# Altium PCB PCB1.PcbDoc
Units mil, origin at the board's own origin, x right, y up, seen from the top; angles counter-clockwise.
Board outline 1455 x 980 mil, 2 copper layers (Top Layer, Bottom Layer); 6 components, 4 nets, 26 pads, 2 vias.
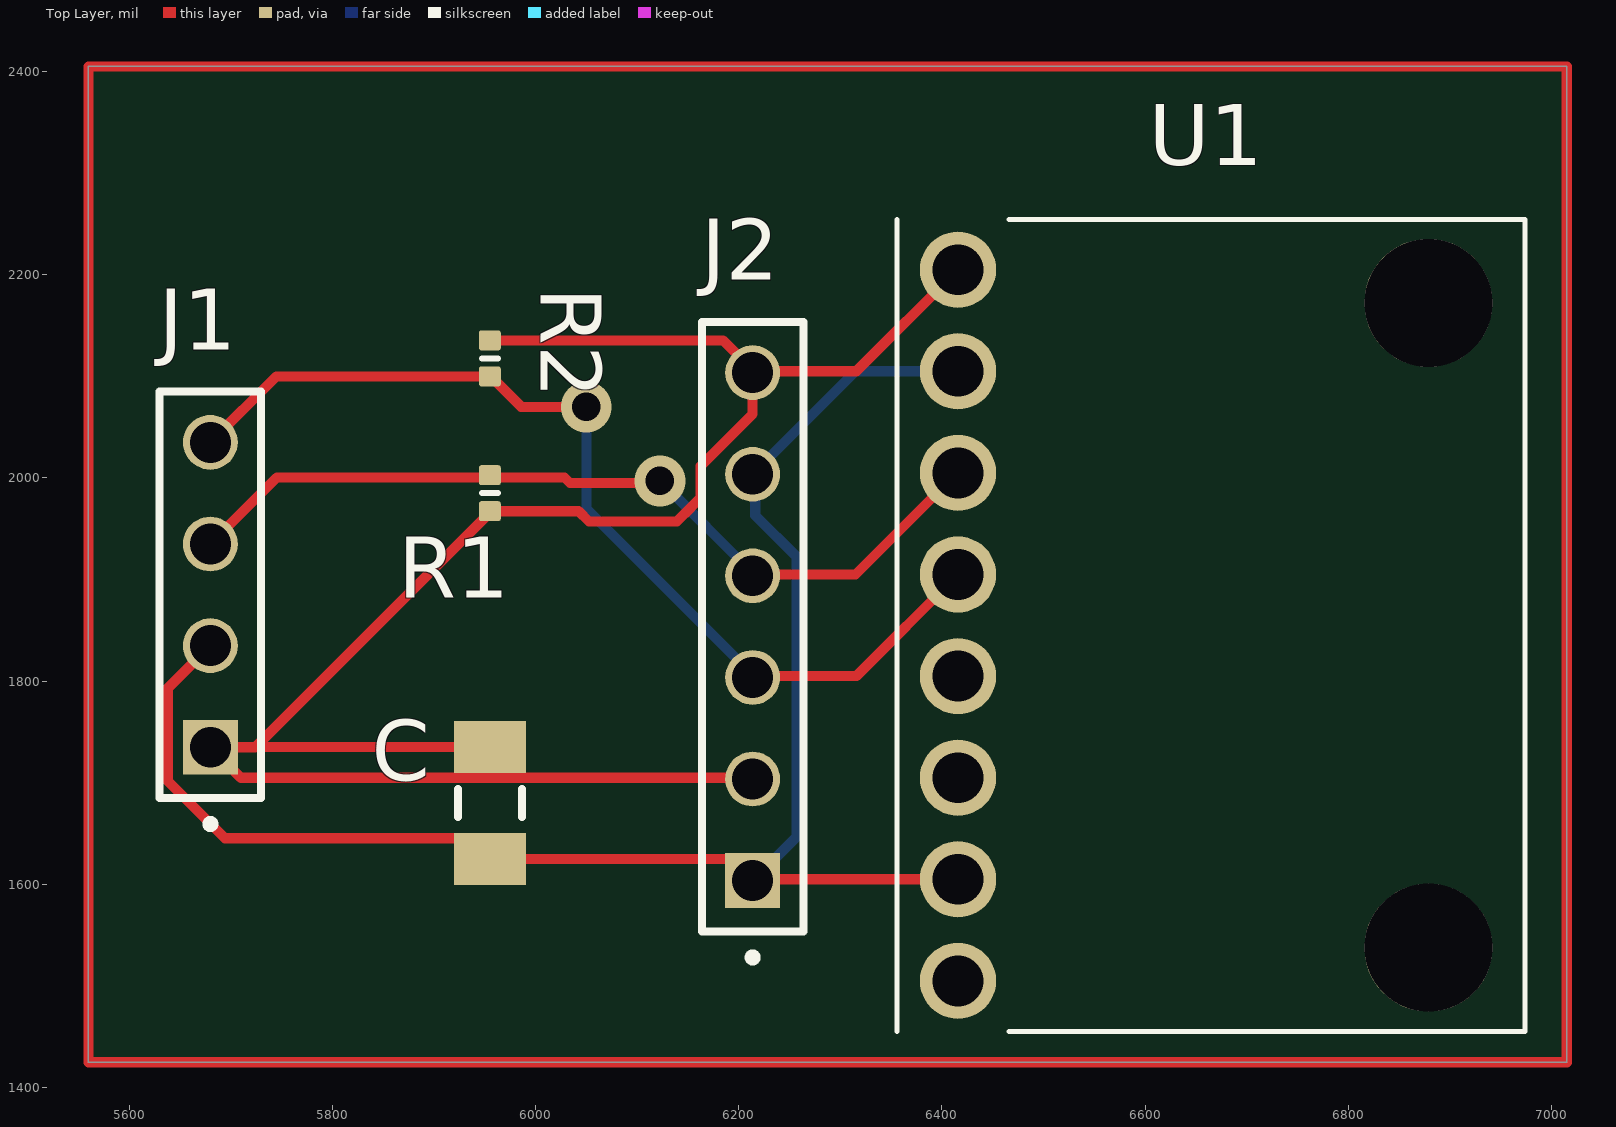
[diagram p0: Top Layer view]
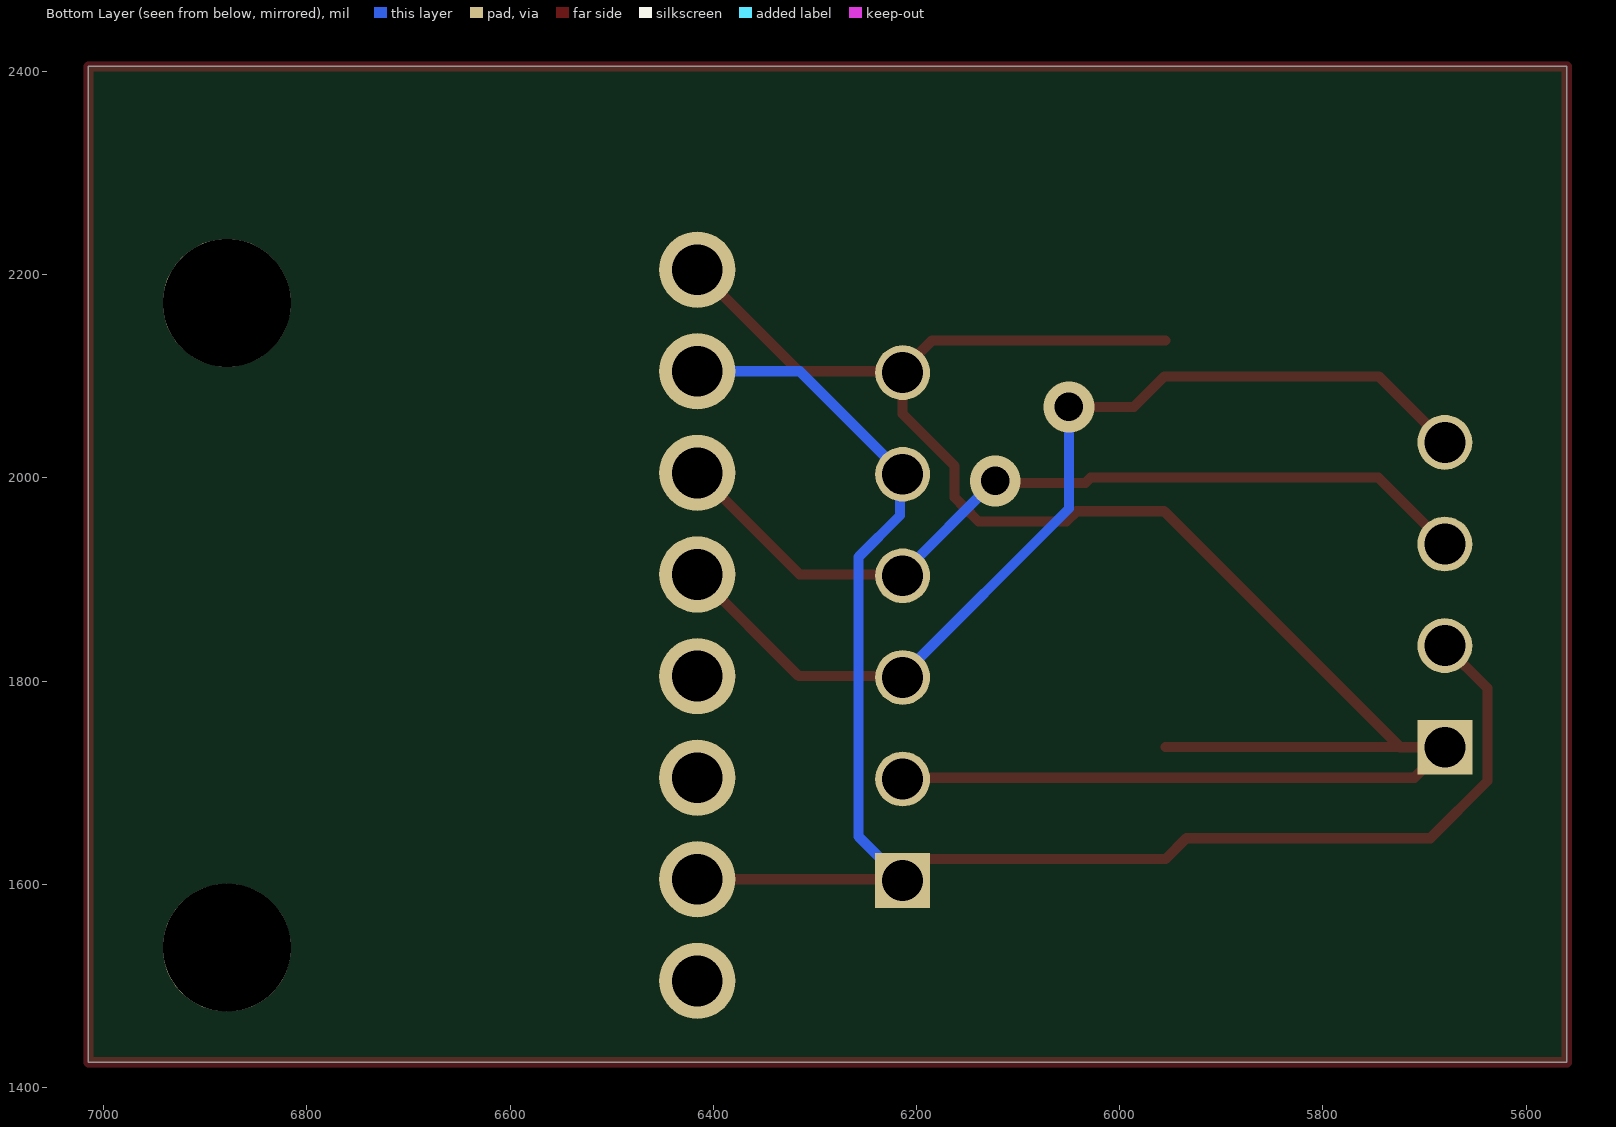
[diagram p1: Bottom Layer view, seen from below]
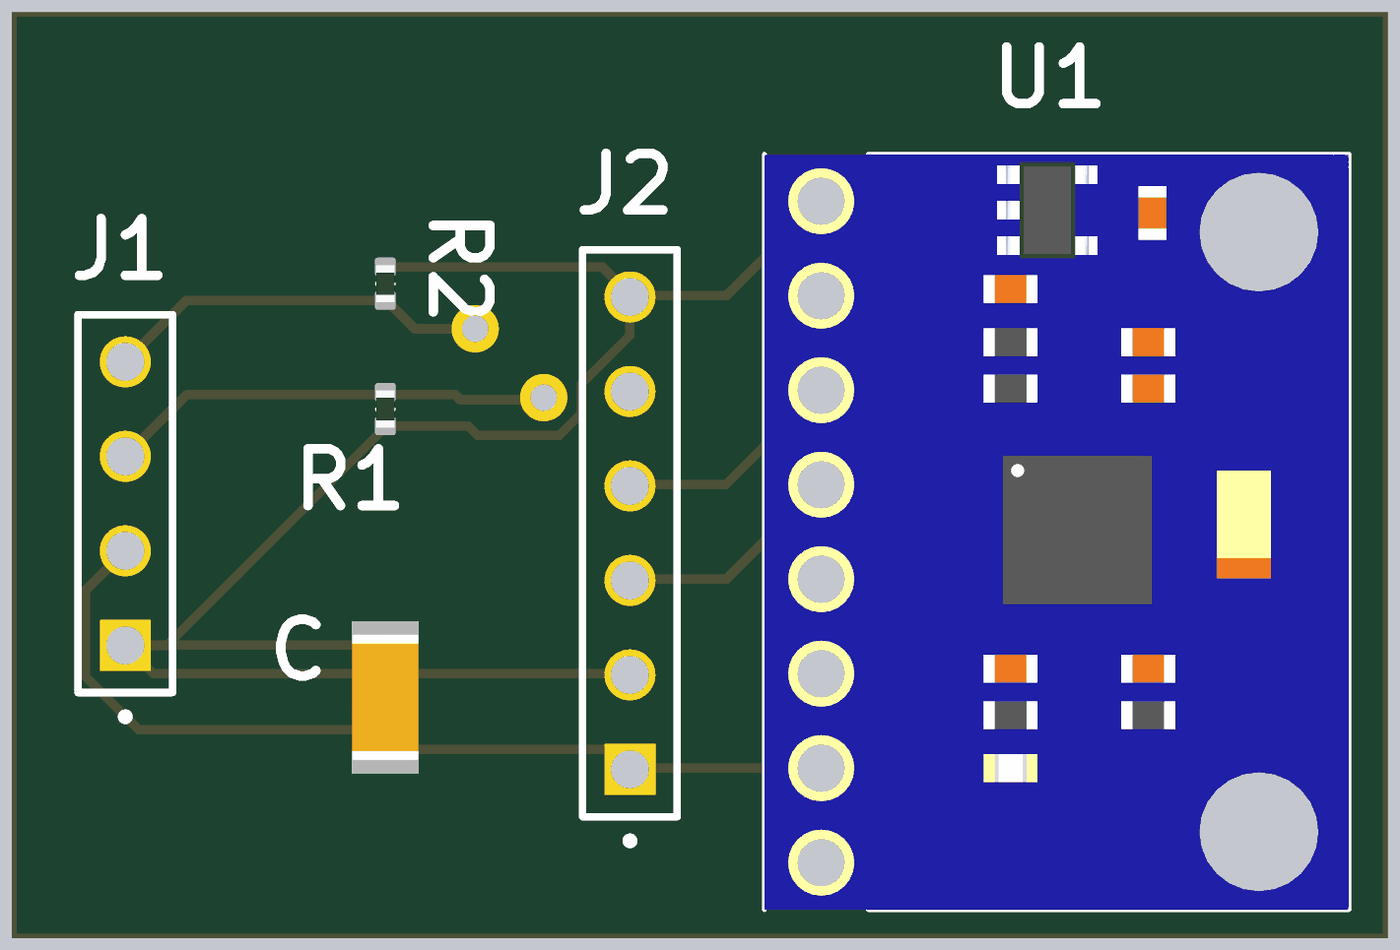
[diagram p2: 3D render of the assembled board from above, using the file's embedded part models]

## Layer stack, top to bottom
Top Solder: solder mask 0.4, Solder Resist, Dk 3.5
Top Layer: signal copper 1.4
Dielectric 1: core 12.6, FR-4, Dk 4.8
Bottom Layer: signal copper 1.4
Bottom Solder: solder mask 0.4, Solder Resist, Dk 3.5

## Board outline
5560,1425 5560,2405 7015,2405 7015,1425

## Design rules (kind name [scope] priority, off if disabled: settings)
Clearance [All] p1: gap=10 ignorepadtopadclearanceinfootprint=FALSE
PolygonConnect [All] p1: connectstyle=Relief reliefconductorwidth=10 reliefentries=4 polygonreliefangle="90 Angle" airgapwidth=10
RoutingVias [All] p1: holewidth=28 width=50 viastyle="Through Hole" minholewidth=28 minwidth=50 maxholewidth=28 maxwidth=50
SolderMaskExpansion [All] p1: expansion=0 istentingtop=FALSE
SupplyNets "Schematic Supply Nets" [InNet('GND')] p1: voltage=0.000
Width [All] p1: maxlimit=10 minlimit=10 preferedwidth=10
30 further rules are at their usual default settings.

## Components (designator, comment, footprint, x,y, rotation, side; value= is the part's Value field where it differs from the comment)
C "Capacitor 10 uF +/- 10% 16 V 1206" CAPC3216X180X50NL20T25 5955,1680 r270 top value=10µF
J1 "TSW-104-26-G-S" SAMTEC_TSW-104-26-G-S 5680,1735 r90 top
J2 "TSW-106-26-G-S" SAMTEC_TSW-106-26-G-S 6213.68,1603.68 r90 top
R1 "1KR2J" RESC0402(1005)_L 5955,1985 r90 top value=1k
R2 "1KR2J" RESC0402(1005)_L 5955,2117.72 r270 top value=1k
U1 "GY-521" MODULE_GY-521 6665,1855 r0 top

## Footprints (in the part's own frame and the unit in brackets; to place one, negate y for a bottom-side part, rotate by r counter-clockwise, add the part's x,y. Pads: shape width x height; smd on the part's side, far side on the other; paste and mask are expansions set on the pad)
CAPC3216X180X50NL20T25 [mm] "Chip Capacitor, 2-Leads, Body 3.40x1.80mm, IPC Medium Density"
  rect 1.3x1.8 smd: 1(-1.4,0) 2(1.4,0)
  silkscreen extent -0.35,-0.8 0.35,0.8, body extent -1.7,-0.9 1.7,0.9, height 1.8
MODULE_GY-521 [mm]
  round 1.905 hole 1.27 mask+0.102: AD0(-6.33,-6.35) GND(-6.33,6.35) INT(-6.33,-8.89) SCL(-6.33,3.81) SDA(-6.33,1.27) VCC(-6.33,8.89) XCL(-6.33,-3.81) XDA(-6.33,-1.27)
  round 3.2 hole 3.2 unplated mask+0: ""(5.43,-8.06) ""(5.43,8.06)
  silkscreen extent -7.85,-10.15 7.85,10.15, body extent -7.85,-10.15 7.85,10.15, height 3
RESC0402(1005)_L [mm] "Chip Resistor, Body 1.0x0.5mm, IPC High Density"
  rrect25% 0.5x0.55 smd: 1(-0.45,0) 2(0.45,0)
  silkscreen extent 0,-0.2 0,0.2, body extent -0.5,-0.25 0.5,0.25, height 0.3
SAMTEC_TSW-104-26-G-S [mm]
  rect 1.37x1.37 hole 1.02: 01(0,0)
  round 1.37 hole 1.02: 02(2.54,0) 03(5.08,0) 04(7.62,0)
  silkscreen extent -2.02,-1.27 8.89,1.27
SAMTEC_TSW-106-26-G-S [mm]
  rect 1.37x1.37 hole 1.02: 01(0,0)
  round 1.37 hole 1.02: 02(2.54,0) 03(5.08,0) 04(7.62,0) 05(10.16,0) 06(12.7,0)
  silkscreen extent -2.02,-1.27 13.97,1.27

## Part data
C: library part CMP-001-00016-6, "Chip Capacitor, 10 uF, +/- 10%, 16 V, 1206 (3216 Metric)", Capacitor Type=Ceramic, Case/Package=1206, Max Operating Temperature=125°C, Min Operating Temperature=-55°C, Tolerance=10%, Voltage Rating=16V, Mounting Technology=SM, Pins=2, RoHS Compliant=True
J1: library part CMP-009-000000-1, Package=None, Availability=Unavailable, Component Type=Standard, Design Item ID=TSW-104-26-G-S, MP=TSW-104-26-G-S, Pin Count=4, Price=None, Source=TSW-104-26-G-S.SchLib
J2: library part CMP-007-000000-1, Package=None, Availability=Unavailable, Component Type=Standard, Design Item ID=TSW-106-26-G-S, MP=TSW-106-26-G-S, Pin Count=6, Price=None, Source=TSW-106-26-G-S.SchLib
R1 R2: library part CMP-009-00075-2, "1K 0.063W 5% 0402 (1005 Metric)  SMD", Case/Package=0402, Power=63mW, Tolerance=5%, Mounting Technology=SMT, Pins=2
U1: library part CMP-005-000000-1, "Triple Axis Accelerometer Gyro Breakout", Package=Package, Check_prices=https://www.snapeda.com/parts/GY-521/GODREAM+FORDREAM+CO.%252C+LIMITED/view-part/?ref=eda, Component Type=Standard, Design Item ID=GY-521, MF="GODREAM FORDREAM CO., LIMITED", MP=GY-521, Pin Count=8, SnapEDA_Link=https://www.snapeda.com/parts/GY-521/GODREAM+FORDREAM+CO.%252C+LIMITED/view-part/?ref=snap, Source=GY-521.SchLib

## Via types
v1: diameter 50, hole 28, Top Layer to Bottom Layer, 2 vias

## Nets (pads, with @x,y where several pads share a name; then routed paths per layer and width w, separated by ;. In a path a pad name is that pad's centre, name@x,y a point inside that pad or via, vN(x,y) a via of type N, cw(c..) or ccw(c..) an arc to the next point about the centre after c; other vN are vias at no path point)
GND: C.2 J1.02 J2.01 J2.05 U1.AD0 U1.GND | length 1645.4
  Top Layer w10: J1.02 5638.03,1793.03 5638.03,1701.82 5694.38,1645.47 5934.41,1645.47 C.2 6195.12,1624.88 6215,1605 U1.AD0
  Bottom Layer w10: J2.01@6215,1605 6256.97,1646.97 6256.97,1922.38 6216.32,1963.03 6216.32,2003.68 6215,2005 6315,2105 U1.GND
SCL: J1.03 J2.04 R1.2 U1.SCL | length 840.4
  Top Layer w10: J1.03 5745.43,2000.43 6028.54,2000.43 6033.97,1995 6120.35,1995 v1(6122.48,1997.13) ; J2.04@6215,1905 6315,1905 U1.SCL@6411.88,2001.88
  Bottom Layer w10: v1(6122.48,1997.13) 6122.87,1997.13 J2.04@6215,1905
SDA: J1.04 J2.03 R2.2 U1.SDA | length 983.9
  Top Layer w10: J1.04 5745,2100 R2.2 ; R2.2@5955.98,2100 5985.98,2070 v1(6050,2070) ; J2.03@6215,1805 6315.79,1805 U1.SDA
  Bottom Layer w10: v1(6050,2070) 6050,1970 J2.03@6215,1805
VCC: C.1 J1.01 J2.02 J2.06 R1.1 R2.1 U1.VCC | length 2032.1
  Top Layer w10: 5724.02,1735.12 C.1 ; R2.1 6184.57,2135.43 J2.06@6215,2105 ; J2.02@6215,1705 5710,1705 J1.01 5724.02,1735 5956.3,1967.28 6042.44,1967.28 6052.59,1957.13 6139.05,1957.13 6153.13,1971.22 6153.03,1971.32 6162.48,1980.76 6162.48,2011.83 6213.68,2063.03 J2.06 J2.06@6215,2105 ; U1.VCC 6315.79,2105 J2.06@6215,2105
pads on no net: U1. U1.INT U1.XCL U1.XDA
copper on no net: | length 4870
  Top Layer w10: 5560,1425 7015,1425 7015,2405 5560,2405 5560,1425